# Altium PCB Ver1.PcbDoc
Units mm, origin at the board's own origin, x right, y up, seen from the top; angles counter-clockwise.
Board outline 95.63 x 45.27 mm, 2 copper layers (Top Layer, Bottom Layer); 32 components, 20 nets, 88 pads, 26 vias.
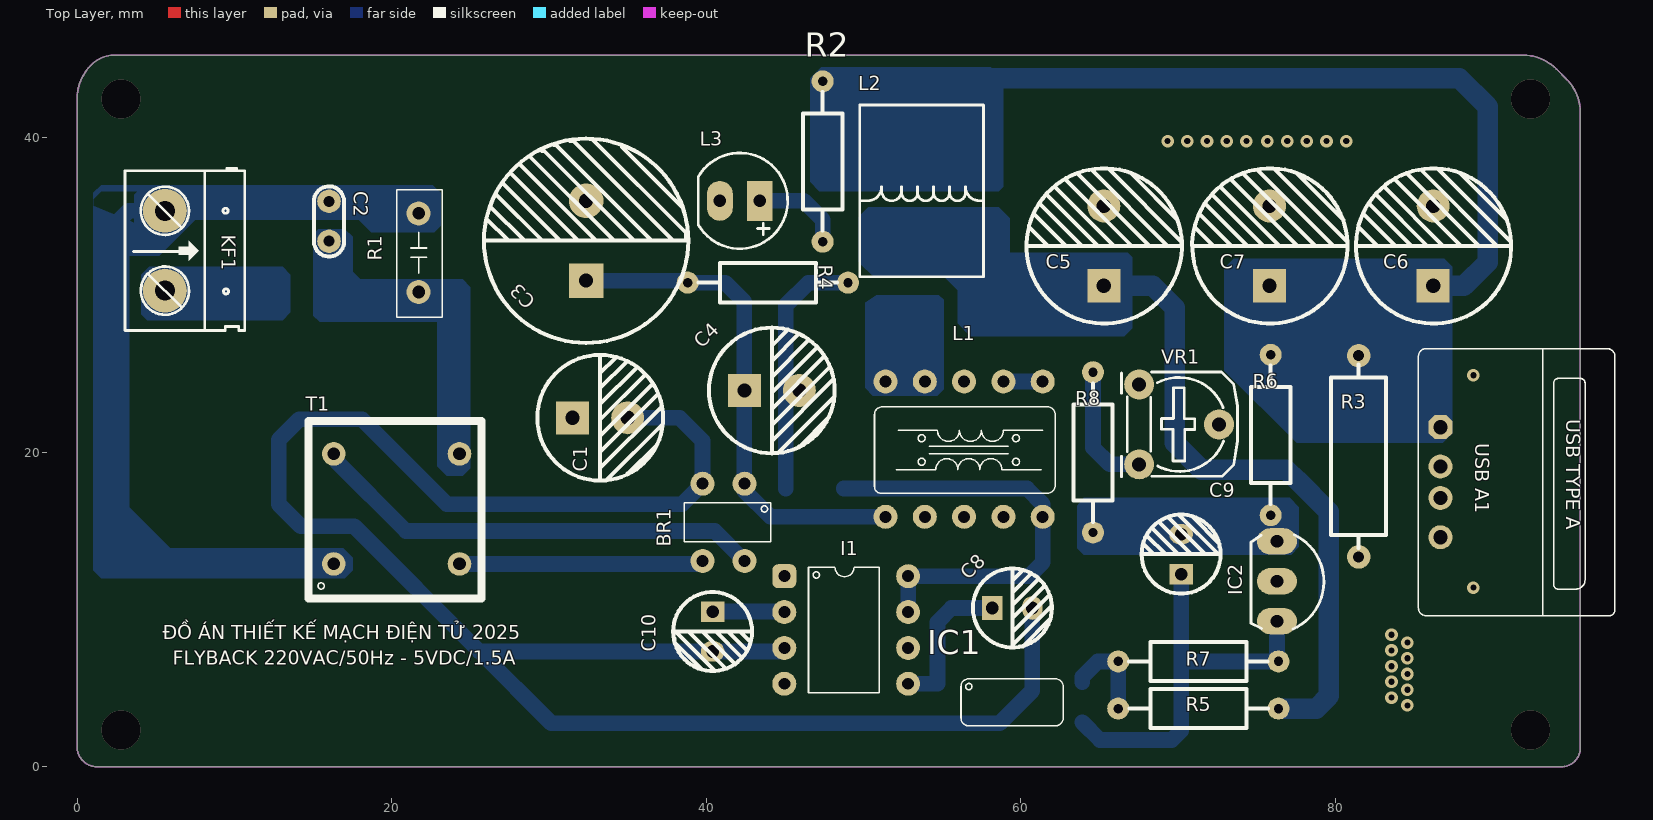
[diagram p0: Top Layer view]
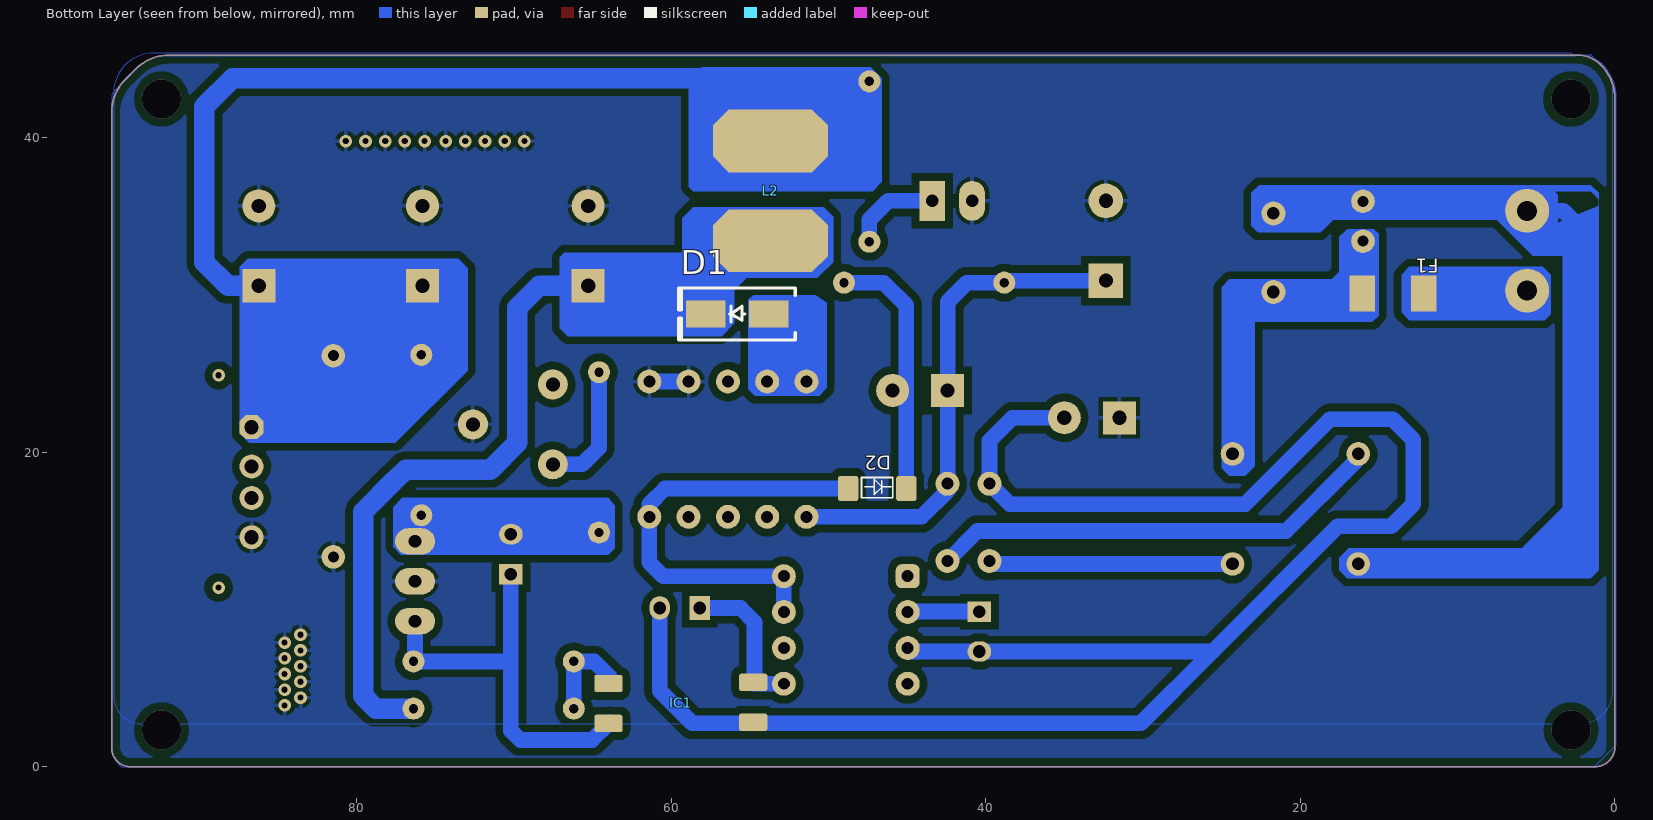
[diagram p1: Bottom Layer view, seen from below]
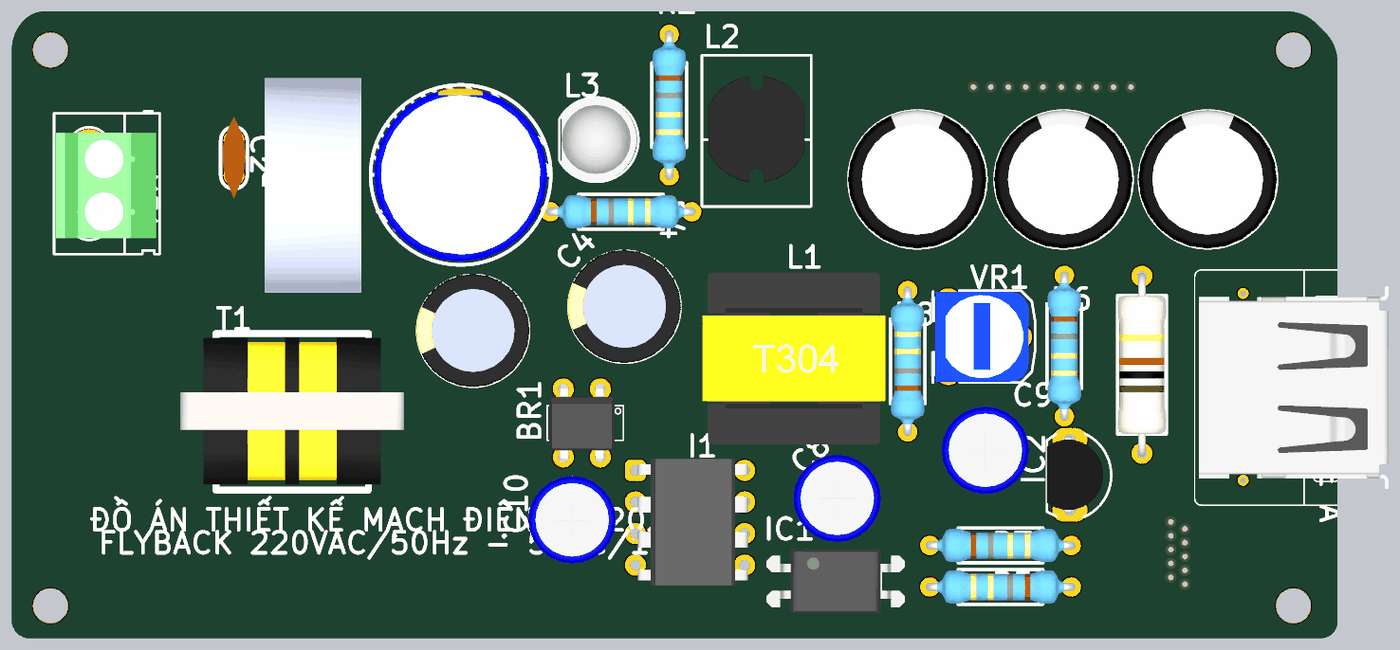
[diagram p2: 3D render of the assembled board from above, using the file's embedded part models]
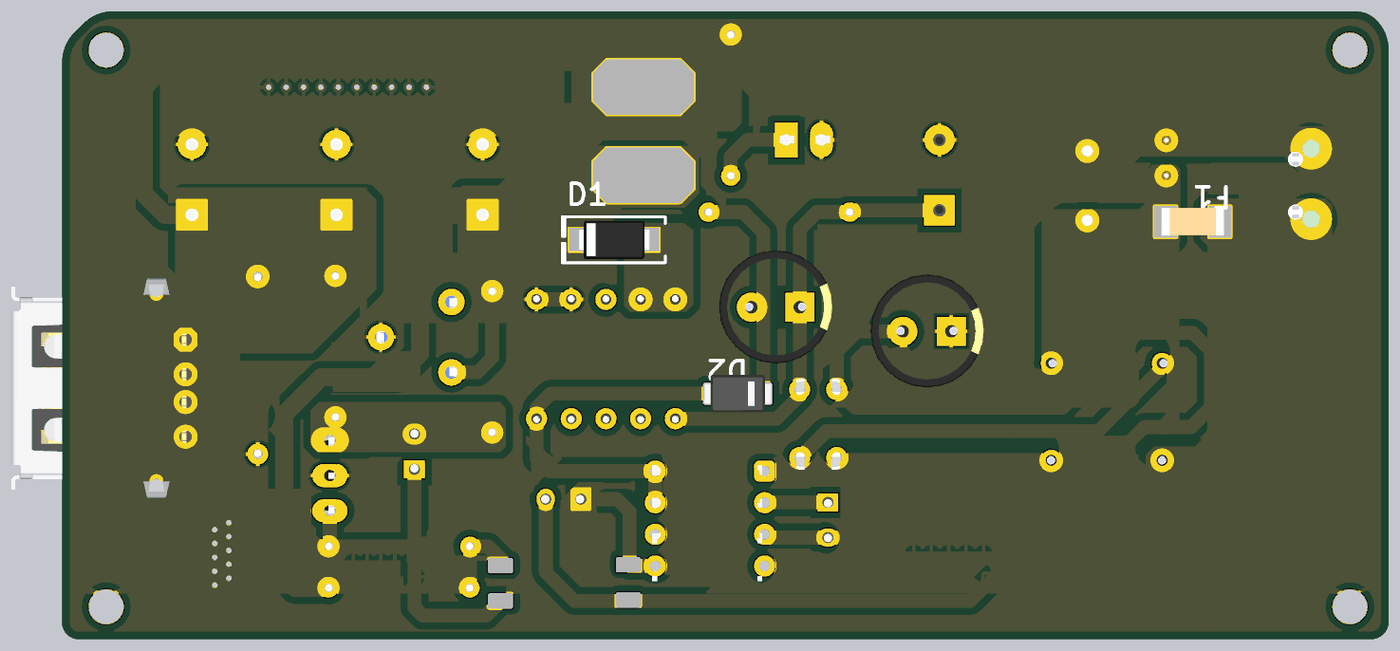
[diagram p3: 3D render of the assembled board from below, using the file's embedded part models]

## Layer stack, top to bottom
Top Solder: solder mask 0.0102, Solder Resist, Dk 3.5
Top Layer: signal copper 0.0356
Dielectric 1: dielectric 0.32, FR-4, Dk 4.8
Bottom Layer: signal copper 0.0356
Bottom Solder: solder mask 0.0102, Solder Resist, Dk 3.5

## Board outline
-0.027,1.27 -0.027,42.478 cw(c3.039,42.478) 0.871,44.646 cw(c2.382,43.135) 2.513,45.268 2.513,45.272 91.934,45.272 cw(c91.934,42.237) 94.08,44.383 94.706,43.757 cw(c92.538,41.589) 95.604,41.589 95.604,1.2 cw(c94.404,1.2) 94.404,0 1.243,0 cw(c1.243,1.27)

## Design rules (kind name [scope] priority, off if disabled: settings)
Clearance [All] p1: gap=0.5 ignorepadtopadclearanceinfootprint=FALSE
PolygonConnect [All] p1: connectstyle=Relief reliefconductorwidth=0.254 reliefentries=4 polygonreliefangle="90 Angle" airgapwidth=0.254
RoutingVias [All] p1: holewidth=0.711 width=1.27 viastyle="Through Hole" minholewidth=0.711 minwidth=1.27 maxholewidth=0.711 maxwidth=1.27
SolderMaskExpansion [All] p1: expansion=0.102
Width [All] p1: maxlimit=1.5 minlimit=1 preferedwidth=1.3
30 further rules are at their usual default settings.

## Components (designator, comment, footprint, x,y, rotation, side; value= is the part's Value field where it differs from the comment)
BR1 "MB6M" MB6M 41.1,15.4 r180 top
C1 "2.2nF" "tu hoa 8mm" 33.25,22.2 r0 top
C2 "104" "tu gom" 16,34.7 r90 top
C3 "22uF" "tu hoa 13mm" 32.358,33.461 r90 top
C4 "2.2nF" "tu hoa 8mm" 44.169,23.936 r0 top
C5 "1000uF" "tu hoa 10mm" 65.286,33.137 r90 top
C6 "1000uF" "tu hoa 10mm" 86.241,33.137 r90 top
C7 "1000uF" "tu hoa 10mm" 75.827,33.137 r90 top
C8 "0.1uF" "tu hoa 5mm" 59.47,10.1 r0 top
C9 "0.1uF" "tu hoa 5mm" 70.204,13.522 r90 top
C10 "100uF" "tu hoa 5mm" 40.4,8.6 r270 top
D1 "SS54 - SMC" "DIODE SMA" 55.8,28.8 r0 bottom
D2 "RS1M SMA" "RS1M SMA" 46.9,17.7 r0 bottom
F1 "0.5A 125V" "Cau Chi SMD1808" 14.1,30.1 r0 bottom
I1 "DK1203" DK1203 48.9,8.7 r270 top
IC1 "PC817" PC817 58.6,4.1 r0 top
IC2 "TL431" qto-92 76.3,11.8 r270 top
KF1 "CON 2 KF301" "Con 2 KF301 5.08" 5.561,35.366 r270 top
L1 "EE 13" "Trans EE13" 56.4,20.2 r0 top
L2 "10uH - 4A SMD" "Cuon Cam 7x7x5" 53.694,32.826 r0 top
L3 "LED 5mm" LED-5MM-RED 43.4,36 r180 top
R1 "7D471" "Inrush current limiter" 21.7,32.7 r270 top
R2 "1k" "tro vach 1/4w" 47.4,38.5 r90 top
R3 "470R" "tro vach 1/2w" 81.5,19.75 r90 top
R4 "68k" "tro vach 1/4w" 43.915,30.794 r180 top
R5 "1k" "tro vach 1/4w" 71.3,3.7 r0 top
R6 "4.7k" "tro vach 1/4w" 75.9,21.1 r90 top
R7 "4.7k" "tro vach 1/4w" 71.3,6.7 r180 top
R8 "4.7k" "tro vach 1/4w" 64.6,20 r270 top
T1 "UU9.8 103" "UU8.9 103" 20.5,16.1 r0 top
"USB A1" "USB" "USB A" 86.7,18.1 r270 top
VR1 "500R" "Bien Tro Tam Giac Dung" 67.537,24.317 r270 top

## Footprints (in the part's own frame and the unit in brackets; to place one, negate y for a bottom-side part, rotate by r counter-clockwise, add the part's x,y. Pads: shape width x height; smd on the part's side, far side on the other; paste and mask are expansions set on the pad)
"Bien Tro Tam Giac Dung" [mil] "RM065"
  round 75 hole 35: 1(0,0) 2(100,200) 3(200,0)
  silkscreen extent -31,-44 231,246, body extent -28,-50 228,228, height 279
"Cau Chi SMD1808" [mil]
  rect 64x90 smd: 1(-77,0) 2(77,0)
  body extent -91,-39 91,39, height 39
"Con 2 KF301 5.08" [mil]
  round 110 hole 50: 1(0,0) 2(200,0)
  silkscreen extent -106,-100 300,200, body extent -45,-97 255,190, height 335
"Cuon Cam 7x7x5" [mm] "Cuon Cam 7x7x5"
  oct 7.3x4 smd far side: 1(0,0.635) 2(0,6.985)
  silkscreen extent -3.94,-1.65 3.94,9.27, body extent -3.5,0.07 3.5,7.8, height 5.02
"DIODE SMA" [mm] "SMA"
  rect 2.5x1.7 smd: 1(-2,0) 2(2,0)
  silkscreen extent -3.68,-1.65 3.75,1.65, body extent -2.6,-1.37 2.6,1.37, height 2.4
DK1203 [mil]
  rrect50% 60x60 hole 30: 1(-134.65,-155.12)
  round 60 hole 30: 2(-44.88,-155.12) 3(44.88,-155.12) 4(134.65,-155.12) 5(134.65,155.12) 6(44.88,155.12) 7(-44.88,155.12) 8(-134.65,155.12)
  silkscreen extent -157,-94 157,83, body extent -167,-148 193,164, height 180
"Inrush current limiter" [mm]
  round 1.524 hole 0.8: 1(-2.5,0) 2(2.5,0)
  silkscreen extent -4,-1.4 4.1,1.5, body extent -7.75,-3.5 7.75,3.5, height 19
LED-5MM-RED [mil] "LED 2 PIN, 5 ly , Only colour,pin to pin 100mil"
  rect 65x100 hole 32: 1(0,0)
  oval 65x100 hole 32: 2(100,0)
  silkscreen extent -70,-120 154,120, body extent -65,-119 149,118, height 339
MB6M [mil]
  round 60 hole 30: 1(-52.56,-102.56) 2(52.56,-102.56) 3(52.56,90.75) 4(-52.56,90.75)
  silkscreen extent -118,-55 98,43, body extent -92,-133 92,125, height 83
PC817 [mm]
  rrect25% 1.8x1.1 smd far side: 1(-3.81,1.27) 2(-3.81,-1.27) 3(5.4,-1.34) 4(5.4,1.2)
  silkscreen extent -2.4,-1.5 4.1,1.5, body extent -4.2,-2.29 5.8,2.29, height 3.75
qto-92 [mil] "TO-92"
  oval 66x100 hole 32: 1(-100,0) 2(0,0) 3(100,0)
  silkscreen extent -117,-65 120,118, body extent -109,-66 109,95, height 245
"RS1M SMA" [mm]
  rrect25% 1.3x1.6 smd: 1(-1.85,0) 2(1.85,0)
  silkscreen extent -1,-0.7 1,0.6, body extent -2.5,-1.35 2.5,1.35, height 2.38
"Trans EE13" [mil]
  round 60 hole 30: 1(-196.85,-169.29) 2(-98.43,-169.29) 3(0,-169.29) 4(98.43,-169.29) 5(196.85,-169.29) 6(196.85,169.29) 7(98.43,169.29) 8(0,169.29) 9(-98.43,169.29) 10(-196.85,169.29)
  silkscreen extent -224,-110 228,106, body extent -260,-244 260,244, height 468
"tro vach 1/2w" [mm]
  round 1.5 hole 0.7: 1(-6.4,0) 2(6.4,0)
  silkscreen extent -5.84,-1.75 5.84,1.75, body extent -6.62,-1.75 6.62,1.75, height 3.5
"tro vach 1/4w" [mm]
  round 1.4 hole 0.6: 1(-5.1,0) 2(5.1,0)
  silkscreen extent -4.39,-1.25 4.42,1.25, body extent -5.38,-1.2 5.38,1.2, height 2.41
"tu gom" [mm] "Tu gom mini"
  round 1.5 hole 0.7: 1(-1.27,0) 2(1.27,0)
  silkscreen extent -2.25,-0.97 2.22,0.97, body extent -2.92,-0.85 2.92,0.85, height 6.12
"tu hoa 5mm" [mm]
  rect 1.3x1.5 hole 0.8: 1(-1.27,0)
  oval 1.3x1.5 hole 0.8: 2(1.27,0)
  silkscreen extent -2.51,-2.51 2.51,2.51, body extent -3.12,-3.18 3.23,3.18, height 14.55
"tu hoa 8mm" [mm]
  rect 2.1x2.1 hole 0.9: 1(-1.75,0)
  round 2.1 hole 0.9: 2(1.75,0)
  silkscreen extent -4,-4 4,4, body extent -4.1,-4.07 4.1,4.13, height 13.81
"tu hoa 10mm" [mm]
  rect 2.1x2.1 hole 0.9: 1(-2.54,0)
  round 2.1 hole 0.9: 2(2.54,0)
  silkscreen extent -4.95,-4.96 4.93,4.92, body extent -5,-5 4.97,5, height 20.01
"tu hoa 13mm" [mm]
  rect 2.2x2.2 hole 0.9: 1(-2.54,0)
  round 2.2 hole 0.9: 2(2.54,0)
  silkscreen extent -6.5,-6.5 6.5,6.5, body extent -6.25,-6.25 6.26,6.25, height 23.02
"USB A" [mm]
  oct 1.524x1.524 hole 0.9: 1(-3.5,0)
  round 1.524 hole 0.9: 2(-1,0) 3(1,0) 4(3.5,0)
  silkscreen extent -8.5,-1.4 8.5,11.1, body extent -7.9,-1.1 7.9,12.6, height 6.95
"UU8.9 103" [mm]
  round 1.5 hole 0.8: 1(-4.2,-3.2) 2(3.8,-3.2) 3(3.8,3.8) 4(-4.2,3.8)
  silkscreen extent -5.8,-5.4 5.2,5.9, body extent -8.38,-5 7.78,5.6, height 15.3

## Part data
C1 C4: library part "Tu Hoa 2.2uF 400V 8x12", "C?m", Chung_Loai=C?m, Don_Vi=Con, Ma_Hang=MH003743, So_Chan=2, Ten_Linh_Kien="T? Hóa 2.2uF 400V 8x12MM"
C2: library part "Tu gom 104 50V", "C?m", Chung_Loai=C?m, Don_Vi=Con, Ma_Hang=MH004761, So_Chan=2, Ten_Linh_Kien="T? g?m 104 100nF 50V"
C3: library part "Tu Hoa 22uF 400V 13x20", "C?m", Chung_Loai=C?m, Don_Vi=Con, Ma_Hang=MH004801, So_Chan=2, Ten_Linh_Kien="T? Hóa 22uF 400V 13x20MM"
C5 C6 C7: library part "Tu Hoa 1000uF 10V 10x12", "C?m", Chung_Loai=C?m, Don_Vi=Con, Ma_Hang=MH006614, So_Chan=2, Ten_Linh_Kien="T? Hóa 1000uF 10V 10x12MM"
C8 C9: library part "Tu Hoa 0.1uF 50V 5x11", "C?m", Chung_Loai=C?m, Don_Vi=Con, Ma_Hang=MH006853, So_Chan=2, Ten_Linh_Kien="T? Hóa 0.1uF 50V"
C10: library part "Tu Hoa 100uF 16V 5x7", "C?m", Chung_Loai=C?m, Don_Vi=Con, Ma_Hang=MH001347, So_Chan=2, Ten_Linh_Kien="T? Hóa 100uF 16V 5x7MM"
D1: library part "Diode SS34 ( 1N5822 )", "Dán", Chung_Loai=Dán, Don_Vi=Con, Ma_Hang=MH002104, Ten_Linh_Kien="Diode SS34 3A 40V SMA ( 1N5822 SS34A)"
F1: library part "Cau chi 0.5A 125V SMD1808", "Cau chi 0.5A 125V SMD1808", Ma_Hang=MH009241, Ten="C?u Chì 0.5A 125V SMD1808 0451.500MRL"
I1: library part Dk1203
IC1: library part PC871
IC2: "Programmable Shunt Regulator"
KF1: "C?m", Chung_Loai=C?m, Don_Vi=Con, Ma_Hang=MH000987, Ten_Linh_Kien="CON 2 KF301-2P 5.08MM Xanh Duong"
L1: library part "EE 20-10-6"
L2: library part "CUON CAM 47uH SMD", "Dán", Chung_Loai=Dán, Don_Vi=Con, Ma_Hang=MH004211, Ten_Linh_Kien="Cu?n C?m 47uH 7x7x4MM CD74R"
L3: library part "LED 5mm Do", "C?m", Chung_Loai=C?m, Don_Vi=Con, Ma_Hang=MH008967, Ten_Linh_Kien="Led 5MM Ph? Ð? (1000c)"
R1: library part "Tu chong set"
R2 R5: library part "Tro Vach 1/4W 5% 1k", "C?m", Chung_Loai=C?m, Don_Vi=Con, Ma_Hang=MH007390, So_Chan=2, Ten_Linh_Kien="Tr? V?ch 1/4w 5% 1k"
R3: library part "Tro Vach 1/2W 5% 470R", "C?m", Chung_Loai=C?m, Don_Vi=Con, Ma_Hang=MH006200, So_Chan=2, Ten_Linh_Kien="Tr? 5% 1/2w 470R"
R4: library part "Tro Vach 1/4W 5% 68k", "C?m", Chung_Loai=C?m, Don_Vi=Con, Ma_Hang=MH007332, So_Chan=2, Ten_Linh_Kien="Tr? V?ch 1/4w 5% 68k"
R6 R7 R8: library part "Tro Vach 1/4W 5% 4.7k", "C?m", Chung_Loai=C?m, Don_Vi=Con, Ma_Hang=MH007317, So_Chan=2, Ten_Linh_Kien="Tr? V?ch 1/4w 5% 4.7k"
"USB A1": library part "USB TYPE A FEMALE"
VR1: library part "Bien tro tam giac 1K Dung", "C?m", Chung_Loai=C?m, Don_Vi=Con, Ma_Hang=MH003709, Ten_Linh_Kien="Bi?n Tr? Tam Giác 102-1K RM065"

## Via types
v1: diameter 0.8, hole 0.4, Top Layer to Bottom Layer, tented both sides, 20 vias
v2: diameter 2.5, hole 2.5, Top Layer to Bottom Layer, 4 vias
v3: diameter 0.8, hole 0.4, Top Layer to Bottom Layer, 2 vias

## Nets (pads, with @x,y where several pads share a name; then routed paths per layer and width w, separated by ;. In a path a pad name is that pad's centre, name@x,y a point inside that pad or via, vN(x,y) a via of type N, cw(c..) or ccw(c..) an arc to the next point about the centre after c; other vN are vias at no path point)
5V-1: C5.1 D1.2 L2.1 R5.2 | length 47.8
  Bottom Layer w1.3: 58.003,30.597 C5.1 68.403,30.597 69.8,29.2 69.8,20.6 71.5,18.9 76.9,18.9 77.55,18.25 77.576,18.25 79.6,16.226 79.6,4.5 78.8,3.7 R5.2
5V-2: "USB A1.1" C6.1 C7.1 L2.2 R2.2 R3.2 R6.2 | length 48.7
  Bottom Layer w1.3: 55.7,43.8 87.9,43.8 89.7,42 89.7,32.1 88.197,30.597 C6.1
DCLine: BR1.1 C3.1 C4.1 L1.1 R4.2 | length 32.3
  Bottom Layer w1: C3.1 38.688,30.921 R4.2 41.206,30.794 42.419,29.581 C4.1 42.419,17.562 44.081,15.9 L1.1
GND-1: BR1.2 C1.2 C8.2 C10.2 I1.3 IC1.2 | length 121.8
  Bottom Layer w1: C1.2 38.3,22.2 39.765,20.735 BR1.2 38.46,16.7 23.5,16.7 18.1,22.1 14.1,22.1 12.8,20.8 12.8,16.7 14.2,15.3 17.6,15.3 25.57,7.33 ; I1.3 44.73,7.33 C10.2 25.57,7.33 ; C8.2 60.74,4.84 58.66,2.76 54.7,2.76 30.14,2.76 25.57,7.33
GND-2: "USB A1.4" C1.1 C3.2 C5.2 C6.2 C7.2 IC2.2 L1.6 L1.7 L3.2 R3.1 VR1.2 | length 2.5
  Bottom Layer w1: L1.7 L1.6
  other v1: 84.6,3.9 83.584,4.4 84.6,4.9 83.584,5.4 84.6,5.9 83.584,6.4 84.6,6.9 83.584,7.4 84.6,7.9 83.584,8.4 69.342,39.8 70.596,39.8 71.85,39.8 73.104,39.8 74.358,39.8 75.692,39.8 76.946,39.8 78.2,39.8 79.454,39.8 80.708,39.8
NetBR1_3: BR1.3 T1.2 | length 15.5
  Bottom Layer w1: T1.2 39.57,12.9 BR1.3
NetBR1_4: BR1.4 T1.4 | length 29.1
  Bottom Layer w1: T1.4 16.465,19.735 16.465,19.435 20.9,15 40.53,15 BR1.4
NetC2_1: C2.1 F1.2 R1.2 T1.3 | length 21.4
  Bottom Layer w1: C2.1 16,30.316 15.97,30.286 16.056,30.2 R1.2 23.5,30.2 24.3,29.4 T1.3
NetC2_2: C2.2 KF1.1 R1.1 T1.1 | length 38.6
  Bottom Layer w1: KF1.1 3.266,35.366 2.1,34.2 2.1,14.4 3.6,12.9 T1.1
NetC4_2: C4.2 D2.1 R4.1 | length 17.1
  Bottom Layer w1: D2.1 C4.2@45.05,23.9 ; C4.2 45.086,23.936 C4.2@45.05,23.9 ; R4.1 46.494,30.794 45.05,29.35 C4.2@45.05,23.9
NetC8_1: C8.1 I1.5 IC1.1 | length 9.6
  Bottom Layer w1: I1.5 54.68,5.28 54.7,5.3 54.7,9.2 55.6,10.1 C8.1
NetC9_1: C9.1 IC1.3 IC2.3 R7.1 | length 25.8
  Bottom Layer w1: IC1.3@63.91,2.83 65.04,1.7 69.6,1.7 70.204,2.304 70.204,6.6 ; C9.1 70.204,6.6 ; IC2.3 76.3,6.8 R7.1 70.304,6.7 70.204,6.6
NetC9_2: C9.2 IC2.1 R6.1 R8.2 | length 0.2
  Bottom Layer w1: C9.2@70.096,14.9 C9.2
NetC10_1: C10.1 I1.2 | length 4.6
  Bottom Layer w1: C10.1 44.93,9.87 I1.2
NetD1_1: D1.1 L1.9 L1.10 | length 6.8
  Bottom Layer w1: L1.10 L1.9 53.8,24.6 D1.1
NetD2_2: D2.2 I1.7 I1.8 L1.5 | length 28
  Bottom Layer w1: D2.2 60.4,17.7 61.4,16.7 L1.5 61.4,13 60.52,12.12 I1.8 I1.7
NetF1_1: F1.1 KF1.2 | length 6.6
  Bottom Layer w1: KF1.2 12.058,30.286 F1.1@12.144,30.2
NetIC1_4: IC1.4 R5.1 R7.2 | length 6
  Bottom Layer w1: IC1.4@63.91,5.37 63.91,5.71 64.9,6.7 R7.2 R5.1
NetL3_1: L3.1 R2.1 | length 5.9
  Bottom Layer w1: L3.1 46.2,36 47.4,34.8 R2.1
NetR8_1: R8.1 VR1.3 | length 8.2
  Bottom Layer w1: R8.1 64.6,20.3 65.663,19.237 VR1.3
pads on no net: "USB A1.2" "USB A1.3" I1.1 I1.4 I1.6 L1.2 L1.3 L1.4 L1.8 VR1.1
copper on no net:
  other v2: 2.767,2.34 92.429,2.34 2.767,42.478 92.429,42.478
  other v3: 88.8,11.4 88.8,24.9

## Polygon pours and split planes (outlines as drawn)
GND-2 on Bottom Layer (solid, pour order 12): 2.009,45.272 92.626,45.272 cw(c92.626,45.026) 92.8,45.2 93.06,45.2 cw(c93.06,42.66) 95.6,42.66 95.6,2.34 cw(c93.06,2.34) 93.06,-0.2 2.34,-0.2 cw(c2.34,2.34) -0.2,2.34 -0.2,43.063 cw(c2.009,43.063)
GND-2 on Bottom Layer "Bottom Layer-No Net" (solid, shelved, pour order 8): 2.449,45.272 2.521,45.2 92.148,45.2 cw(c92.148,42.66) 93.944,44.456 95.5,42.9 cw(c95.249,42.649) 95.604,42.649 95.604,1.3 cw(c93.924,1.3) 95.112,0.112 95,0 1.3,0 -0.1,1.4 -0.1,42.8 cw(c2.073,42.8) 0.536,44.336 1.5,45.3 ccw(c1.568,45.368) 1.568,45.272
GND-2 on Bottom Layer "NONET_L02_P006" (solid, shelved, pour order 6): 2.64,45.272 2.767,45.399 92.937,45.399 cw(c92.937,42.859) 95.477,42.859 95.477,4.505 cw(c93.699,4.505) 93.699,2.727 2.259,2.727 cw(c2.259,4.886) 0.1,4.886 0.1,43.113 cw(c2.259,43.113) 2.259,45.272

## Keep-outs
Keep-Out Layer:
  lines w0.1: 2.513,45.268 ccw(c2.382,43.135) 0.871,44.646 ccw(c3.039,42.478) -0.027,42.478 -0.027,4.83 -0.027,1.27 ccw(c1.243,1.27) 1.243,0 3.04,0 94.208,0 94.404,0 ccw(c94.404,1.2) 95.604,1.2 95.604,41.589 ccw(c92.538,41.589) 94.706,43.757 94.08,44.383 ccw(c91.934,42.237) 91.934,45.272 2.513,45.272

## Other copper
Bottom Layer:
  region net 5V-2: 86.85,20.6 87.45,21.2 87.45,31.8 86.95,32.3 73.55,32.3 72.95,31.7 72.95,25.2 77.55,20.6
  region net 5V-2: 58.1,44.5 58.9,43.7 58.9,36.9 58.6,36.6 47.2,36.6 46.6,37.2 46.6,43.8 47.3,44.5
  region net 5V-1: 58.8,27.4 66.6,27.4 67.1,27.9 67.1,32.4 66.8,32.7 58.7,32.7
  region net 5V-1: 59.3,32
  region net 5V-1: 50.3,35.6 58.6,35.6 59.3,34.9 59.3,27.9 58.8,27.4 56.8,27.4 56,28.2 56,30.3 55.2,31.1 50.7,31.1 49.7,32.1 49.7,35
  region net NetD1_1: 50.8,30 54.8,30 55.1,29.7 55.1,24 54.7,23.6 50.6,23.6 50.1,24.1 50.1,29.5
  region net NetC9_2: 64,17.1 77.1,17.1 77.7,16.5 77.7,14 77.2,13.5 64,13.5 63.6,13.9 63.6,16.6
  region: 64,16.5
  region net NetC2_1: 17,34.2 17.5,33.7 17.5,31.5 18,31 24.5,31 25,30.5 25,19 24.5,18.5 23.5,18.5 22.9,19.1 22.9,28.3 15.4,28.3 15,28.7 15,33.9 15.3,34.2
  region net NetF1_1: 4.55,31.8 13.05,31.8 13.55,31.3 13.55,28.9 13.05,28.4 4.45,28.4 4.05,28.8 4.05,31.3
  region net NetC2_2: 6.059,33.6 6.059,36.6 1.5,36.6 1,36.1 1,12.5 1.5,12 17,12 17.5,12.5 17.5,13.3 16.9,13.9 5.9,13.9 3.3,16.5 3.3,32.5 5.2,32.5 9.3,36.6 9.4,36.6 9,37 1.5,37 1,36.5 1,35.7
  region net NetC2_2: 4.6,37 22.6,37 23.1,36.5 23.1,34.4 22.7,34 18.7,34 17.9,34.8 7.5,34.8 6.2,33.5 4.1,33.5 3.6,34 3.6,36.4 4.1,36.9

## Silkscreen, mask and mechanical layers (free items; w line width, h text height)
Top Overlay:
  text "ĐỒ ÁN THIẾT KẾ MẠCH ĐIỆN TỬ 2025" at 5.434,7.807 h1.52
  text "FLYBACK 220VAC/50Hz - 5VDC/1.5A" at 6.069,6.156 h1.52

## Text inside footprints (layer, text, board x,y; h text height)
"USB A1": Top Overlay "USB TYPE A" at 94.4,22.1 h1.52 r270